# Altium PCB 1632440A+STM32F103RCT6核心板核心板.pcbdoc (part 2 of 2)
Units mil, origin at the board's own origin, x right, y up, seen from the top; angles counter-clockwise.
Board outline 4628.86 x 2908 mil, 2 copper layers (Top Layer, Bottom Layer); 59 components, 70 nets, 308 pads, 126 vias.
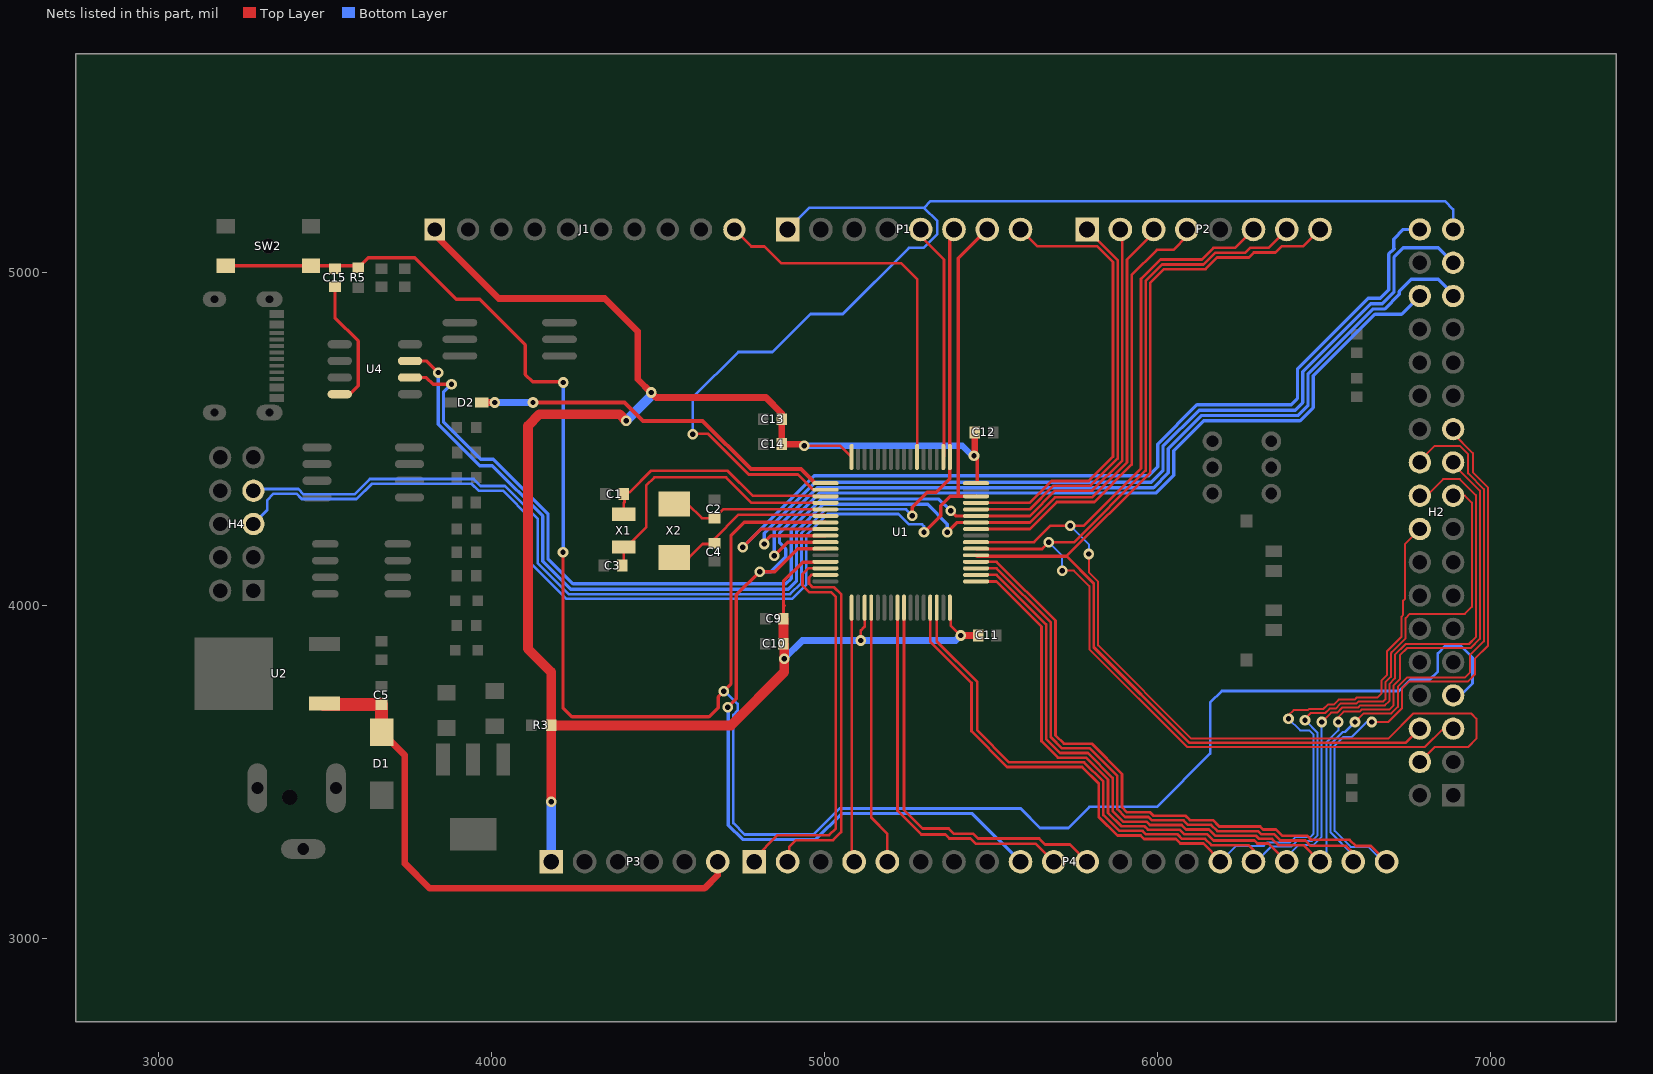
[diagram p2: the nets of this part, all layers, seen from the top]

## Via types
v1: diameter 32, hole 16, Top Layer to Bottom Layer, 126 vias

## Nets (pads, with @x,y where several pads share a name; then routed paths per layer and width w, separated by ;. In a path a pad name is that pad's centre, name@x,y a point inside that pad or via, vN(x,y) a via of type N, cw(c..) or ccw(c..) an arc to the next point about the centre after c; other vN are vias at no path point) (continued)
LCD_D10: H2.18 P4.15 U1.29 | length 2961.8
  Top Layer w6: v1(6393.86,3660) 6393.86,3670 6409.53,3685.67 6452.56,3685.67 6456.08,3689.19 6499.11,3689.19 6512.4,3702.49 6530.43,3702.49 6544.93,3716.99 6592.96,3716.99 6599.96,3723.99 6661.84,3723.99 6672.86,3735 6672.86,3773.85 6689.86,3790.85 6689.86,3862.57 6691.86,3864.23 6691.86,3864.97 6733.82,3906.93 6733.82,3966.93 6738.86,3971.97 6738.86,4015 6744.39,4020.54 6744.39,4185.54 H2.18@6788.86,4230
  Top Layer w8: U1.29@5317.44,3993.63 5317.44,3891.62 5441.46,3767.6 5441.46,3622.4 5548.86,3515 5773.86,3515 5823.86,3465 5823.86,3365 5880.06,3308.8 5949.66,3308.8 5960.11,3298.35 6055.51,3298.35 6068.86,3285 6138.01,3285 6188.86,3234.16 P4.15@6188.86,3230
  Bottom Layer w6: P4.15@6188.86,3230 6236.86,3278 6319.89,3278 6329.87,3287.99 6397.9,3287.99 6413.92,3304 6458.92,3304 6469.86,3314.94 6469.86,3612.03 6456.89,3625 6428.86,3625 v1(6393.86,3660)
LCD_D11: H2.19 P4.16 U1.30 | length 3209
  Top Layer w6: v1(6443.86,3655) 6443.86,3660 6461.05,3677.19 6504.08,3677.19 6517.37,3690.49 6535.4,3690.49 6549.9,3704.99 6597.93,3704.99 6604.93,3711.99 6678.87,3711.99 6684.86,3717.97 6684.86,3768.88 6701.86,3785.88 6701.86,3856.94 6703.86,3858.6 6703.86,3860 6745.82,3901.96 6745.82,3961.96 6758.86,3975 6923.86,3975 6944.86,3996 6944.86,4309 6923.86,4330 H2.19@6888.86,4330
  Top Layer w8: U1.30@5337.13,3993.63 5337.13,3891.73 5458.86,3770 5458.86,3624.8 5554.66,3529 5779.66,3529 5837.86,3470.8 5837.86,3370.8 5885.86,3322.8 5955.45,3322.8 5965.91,3312.35 6061.31,3312.35 6074.66,3299 6143.81,3299 6162.81,3280 6273.86,3280 6288.86,3265 P4.16@6288.86,3230
  Bottom Layer w6: P4.16@6288.86,3230 6296.86,3230 6342.84,3275.99 6402.87,3275.99 6418.89,3292 6463.89,3292 6481.86,3309.97 6481.86,3617 v1(6443.86,3655)
LCD_D12: H2.20 P4.17 U1.33 | length 3308.4
  Top Layer w6: v1(6493.86,3650) 6522.34,3678.49 6540.37,3678.49 6554.87,3692.99 6602.9,3692.99 6609.9,3699.99 6683.84,3699.99 6696.86,3713 6696.86,3763.91 6713.86,3780.91 6713.86,3851.97 6746.35,3884.46 6936.35,3884.46 6956.86,3904.97 6956.86,4332 6908.86,4380 6858.86,4380 6808.86,4330 H2.20@6788.86,4330
  Top Layer w8: U1.33@5455.23,4072.36 5516.5,4072.36 5651.86,3937 5651.86,3592.6 5701.46,3543 5785.45,3543 5851.86,3476.6 5851.86,3376.6 5891.66,3336.8 5961.25,3336.8 5971.71,3326.35 6067.11,3326.35 6080.45,3313 6149.61,3313 6168.61,3294 6291.39,3294 6300.39,3285 6333.86,3285 P4.17@6388.86,3230
  Bottom Layer w6: P4.17@6388.86,3230 6388.86,3245 6423.86,3280 6468.86,3280 6493.86,3305 v1(6493.86,3650)
LCD_D13: H2.21 P4.18 U1.34 | length 3271.1
  Top Layer w6: v1(6543.86,3650) 6543.86,3665 6559.84,3680.99 6607.87,3680.99 6614.87,3687.99 6697.9,3687.99 6708.86,3698.94 6708.86,3758.94 6728.86,3778.94 6728.86,3850 6751.32,3872.46 6941.32,3872.46 6968.86,3900 6968.86,4345 6888.86,4425 H2.21@6888.86,4430
  Top Layer w8: U1.34@5455.23,4092.05 5516.61,4092.05 5665.86,3942.8 5665.86,3598.4 5707.26,3557 5791.25,3557 5865.86,3482.4 5865.86,3382.4 5897.45,3350.8 5967.05,3350.8 5977.51,3340.35 6072.91,3340.35 6086.25,3327 6155.41,3327 6174.41,3308 6297.19,3308 6306.19,3299 6344.86,3299 6363.86,3280 6438.86,3280 P4.18@6488.86,3230
  Bottom Layer w6: P4.18@6488.86,3230 6488.86,3235 6508.86,3255 6508.86,3590 6543.86,3625 v1(6543.86,3650)
LCD_D14: H2.22 P4.19 U1.35 | length 3570.9
  Top Layer w6: v1(6593.86,3650) 6619.84,3675.99 6702.87,3675.99 6722.67,3695.78 6722.67,3755.78 6751.35,3784.46 6924.8,3784.46 6938.86,3798.52 6938.86,3850.07 6980.86,3892.07 6980.86,4349.97 6933.86,4396.97 6933.86,4455 6908.86,4480 6833.86,4480 6788.86,4435 H2.22@6788.86,4430
  Top Layer w8: U1.35@5455.23,4111.73 5516.73,4111.73 5679.86,3948.6 5679.86,3604.2 5713.06,3571 5797.05,3571 5879.86,3488.2 5879.86,3388.2 5903.25,3364.8 5972.85,3364.8 5983.31,3354.35 6078.71,3354.35 6092.05,3341 6161.21,3341 6180.21,3322 6302.99,3322 6311.99,3313 6350.66,3313 6369.66,3294 6444.66,3294 6460.66,3278 6566.86,3278 6588.86,3256 P4.19@6588.86,3230
  Bottom Layer w6: P4.19@6588.86,3230 6588.86,3250 6520.86,3318 6520.86,3583.97 6556.89,3620 6563.86,3620 v1(6593.86,3650)
LCD_D15: H2.23 P4.20 U1.36 | length 3659.8
  Top Layer w6: v1(6643.86,3650) 6693.86,3650 6735.13,3691.28 6735.13,3751.28 6756.32,3772.46 6933.53,3772.46 6953.86,3792.79 6953.86,3840 6993.86,3880 6993.86,4353.94 6947.93,4399.87 6947.93,4457.9 6888.86,4516.97 H2.23@6888.86,4530
  Top Layer w8: U1.36@5455.23,4131.42 5516.83,4131.42 5693.86,3954.4 5693.86,3610 5718.86,3585 5802.85,3585 5893.86,3493.99 5893.86,3393.99 5909.05,3378.8 5978.65,3378.8 5989.1,3368.35 6084.51,3368.35 6097.85,3355 6167.01,3355 6186.01,3336 6308.79,3336 6317.79,3327 6356.45,3327 6375.45,3308 6450.45,3308 6462.45,3296 6577.66,3296 6596.19,3277.46 6641.39,3277.46 P4.20@6688.86,3230
  Bottom Layer w6: v1(6643.86,3650) 6629.21,3650 6584.21,3605 6558.86,3605 6532.86,3579 6532.86,3322.97 6580.83,3275 6633.86,3275 6678.86,3230 P4.20@6688.86,3230
LCD_RD: H2.6 P2.8 U1.37 | length 3198.9
  Top Layer w8: P2.8@6488.86,5130 6438.86,5080 6373.86,5080 6354.86,5061 6289.86,5061 6274.86,5046 6179.45,5046 6144.45,5011 6019.86,5011 5978.86,4970 5978.86,4400 5727.18,4148.33 5808.86,4066.65 5808.86,3874.64 6095.5,3588 6746.86,3588 H2.6@6788.86,3630
  Top Layer w10: U1.37@5455.23,4151.1 5458,4148.33 5727.18,4148.33
LCD_RS: H2.4 P2.6 U1.39 | length 3500.3
  Top Layer w6: v1(5793.86,4155) 5793.86,4100.04 5821.86,4072.04 5821.86,3880.03 6100.89,3601 6694.86,3601 6769.39,3675.54 6943.32,3675.54 6958.86,3660 6958.86,3600 6933.86,3575 6833.85,3575 H2.4@6788.85,3530
  Top Layer w8: U1.39@5455.23,4190.47 5629.33,4190.47 5678.86,4240 v1(5737.91,4240) 5779.26,4240 5950.86,4411.6 5950.86,4981.6 6009.26,5040 6133.86,5040 6168.86,5075 6233.86,5075 P2.6@6288.86,5130
  Bottom Layer w6: v1(5737.91,4240) 5793.86,4184.05 v1(5793.86,4155)
LCD_WR: H2.5 P2.7 U1.38 | length 3294.9
  Top Layer w6: v1(5713.86,4105) 5748.86,4105 5795.86,4058 5795.86,3869.26 6090.12,3575 6803.86,3575 6858.86,3630 H2.5@6888.85,3630
  Top Layer w8: U1.38@5455.23,4170.79 5456.02,4170 5653.86,4170 v1(5673.86,4190) 5749.06,4190 5964.86,4405.8 5964.86,4975.8 6014.06,5025 6138.66,5025 6173.66,5060 6263.86,5060 6278.86,5075 6333.86,5075 P2.7@6388.86,5130
  Bottom Layer w6: v1(5673.86,4190) 5713.86,4150 v1(5713.86,4105)
NRST: C15.1 H2.7 R5.1 SW2.1 SW2.2 U1.7 | length 6760.8
  Top Layer w10: SW2.2@3200.86,5020.9 SW2.1@3456.76,5020.9 3592.62,5020.9 R5.1@3598.86,5014.66 3629.2,5045 3768.22,5045 3893.22,4920 3963.86,4920 4100.86,4783 4100.86,4694 4122.86,4672 4212.86,4672 v1(4214.86,4670) ; v1(4213.86,4160) 4213.86,3693 4241.06,3665.8 4600.06,3665.8 4600.26,3666 4652.86,3666 4680.07,3693.22 4680.07,3725.22 v1(4696.86,3742) 4718.86,3764 4718.86,4210 4758.86,4250 5002.02,4250 U1.7@5002.49,4249.53
  Bottom Layer w8: v1(4696.86,3742) 4700.86,3742 4738.86,3704 4738.86,3684 4725.86,3671 4725.86,3346.21 4760.07,3312 4966.86,3312 5044.86,3390 5589.56,3390 5648.06,3331.5 5732.64,3331.5 5796.14,3395 5998.37,3395 6158.86,3555.49 6158.86,3708 6193.86,3743 6725.86,3743 6760.86,3778 6818.47,3778 6842.86,3802.38 6842.86,3856 6864.86,3878 6912.86,3878 6946.86,3844 6946.86,3766 6910.86,3730 H2.7@6888.86,3730
  Bottom Layer w10: v1(4213.86,4160) 4214.86,4161 v1(4214.86,4670)
PA0: P4.1 U1.14 | length 1212.3
  Top Layer w8: P4.1@4788.86,3230 4788.86,3240 4858.86,3310 5013.86,3310 5033.86,3330 5033.86,4025 5018.86,4040 4953.86,4040 4933.86,4060 4933.86,4095 4950.59,4111.73 U1.14@5002.49,4111.73
PA1: P4.2 U1.15 | length 1116.9
  Top Layer w8: P4.2@4888.86,3230 4893.86,3235 4893.86,3275 4913.86,3295 5025.12,3295 5049.86,3319.73 5049.86,4034 5028.86,4055 4963.86,4055 4953.12,4065.74 4953.12,4084.26 4960.91,4092.05 U1.15@5002.49,4092.05
PA3: P4.4 U1.17 | length 769.1
  Top Layer w8: U1.17@5081.22,3993.63 5081.22,3233.64 5084.86,3230 P4.4@5088.86,3230
PA4: P4.5 U1.20 | length 783.8
  Top Layer w8: U1.20@5140.28,3993.63 5140.28,3362.58 5188.86,3314 P4.5@5188.86,3230
PA8: P2.4 U1.41 | length 1352.1
  Top Layer w8: U1.41@5455.23,4229.84 5616.93,4229.84 5698.09,4311 5810.66,4311 5922.86,4423.2 5922.86,4993.2 5998.66,5069 6047.86,5069 6088.86,5110 P2.4@6088.86,5130
PA9: P2.3 U1.42 U4.7 | length 3671.6
  Top Layer w8: U1.42@5455.23,4249.53 5616.82,4249.53 5692.29,4325 5803.86,4325 5908.86,4430 5908.86,5040 5988.86,5120 P2.3@5988.86,5130
  Top Layer w10: U4.7@3754.47,4735 3803.86,4735 v1(3838.86,4700) ; v1(5368.86,4220) 5398.39,4249.53 U1.42@5455.23,4249.53
  Bottom Layer w10: v1(3838.86,4700) 3838.86,4545 3963.86,4420 4002.04,4420 4152.86,4269.18 4152.86,4133.37 4237.23,4049 4890.48,4049 4915.86,4074.37 4915.86,4223.86 4995.99,4304 5309.86,4304 5368.86,4245 v1(5368.86,4220)
PA10: P2.2 U1.43 U4.6 | length 3557
  Top Layer w8: U1.43@5455.23,4269.21 5616.7,4269.21 5692.49,4345 5804.06,4345 5894.86,4435.8 5894.86,5124 P2.2@5888.86,5130
  Top Layer w10: U4.6@3754.47,4685 3803.86,4685 3823.86,4665 v1(3878.86,4665) ; v1(5378.86,4285) 5394.65,4269.21 U1.43@5455.23,4269.21
  Bottom Layer w10: v1(3878.86,4665) 3854.86,4641 3854.86,4551.63 3966.48,4440 4004.67,4440 4168.86,4275.81 4168.86,4140 4243.86,4065 4883.86,4065 4899.86,4081 4899.86,4230.49 4989.37,4320 5343.86,4320 v1(5378.86,4285)
PA11: P2.1 U1.44 | length 1215.4
  Top Layer w8: U1.44@5455.23,4288.9 5616.59,4288.9 5687.92,4360.23 5799.49,4360.23 5880.86,4441.6 5880.86,5038 P2.1@5788.86,5130
PA12: P1.8 U1.45 | length 1372.4
  Top Layer w8: U1.45@5455.23,4308.58 5616.47,4308.58 5682.12,4374.23 5793.69,4374.23 5866.86,4447.4 5866.86,5032.2 5819.06,5080 5638.86,5080 P1.8@5588.86,5130
PA13: H4.5 P1.7 U1.46 | length 3600.1
  Top Layer w10: v1(5298.86,4220) 5348.86,4270 5348.86,4300 5377.13,4328.27 5402.13,4328.27 ; U1.46@5455.23,4328.27 5402.13,4328.27 ; P1.7@5488.86,5130 5402.13,5043.27 5402.13,4328.27
  Bottom Layer w8: H4.5@3283.86,4245 3325.19,4286.34 3325.19,4316.34 3344.86,4336 3413.06,4336 3429.06,4320 3593.66,4320 3639.66,4366 3939.58,4366 3960.58,4345 4034.06,4345 4119.86,4259.2 4119.86,4125.36 4225.22,4020 4902.5,4020 4944.86,4062.36 4944.86,4211 5008.86,4275 5222.09,4275 5253.09,4244 5292.86,4244 5298.86,4238 v1(5298.86,4220)
PA14: H4.7 P1.6 U1.49 | length 3358.2
  Top Layer w8: U1.49@5376.5,4427.26 U1.49@5376.5,4446.37
  Top Layer w10: v1(5263.86,4270) 5263.86,4295 5308.86,4340 5335.9,4340 5376.5,4380.6 U1.49@5376.5,4427.26 ; U1.49@5376.5,4446.37 5376.5,5117.64 P1.6@5388.86,5130
  Bottom Layer w8: H4.7@3283.86,4345 3288.86,4350 3418.86,4350 3434.86,4334 3587.86,4334 3633.86,4380 3945.38,4380 3966.38,4359 4039.86,4359 4137.86,4261 4137.86,4127.16 4231.02,4034 4896.7,4034 4930.86,4068.16 4930.86,4217.65 5002.21,4289 5244.86,4289 v1(5263.86,4270)
PA15: P1.5 U1.50 | length 713.5
  Top Layer w8: P1.5@5288.86,5130 5288.86,5110 5358.86,5040 5358.86,4448.42 U1.50@5356.81,4446.37
PC0: H2.36 U1.8 | length 2875.7
  Top Layer w10: v1(4753.86,4175) 4808.7,4229.84 U1.8@5002.49,4229.84
  Bottom Layer w10: v1(4753.86,4175) 4968.86,4390 5973.86,4390 6000.86,4417 6000.86,4484.88 6118.97,4603 6401.86,4603 6420.86,4622 6420.86,4709.88 6633.97,4923 6669.42,4923 6695.23,4948.81 6695.23,5056.37 6709.94,5071.08 ; 6711.36,5072.5 6709.94,5071.08 ; H2.36@6788.85,5130 6738.86,5130 6709.94,5101.08 6709.94,5071.08
PC1: H2.33 U1.9 | length 2827.4
  Top Layer w10: v1@4818.86,4190 4838.86,4210 5002.33,4210 U1.9@5002.49,4210.16
  Bottom Layer w10: v1(4818.86,4185) 4818.86,4217.37 4971.48,4370 5981.86,4370 6016.86,4405 6016.86,4478.25 6125.6,4587 6413.86,4587 6436.86,4610 6436.86,4703.25 6640.6,4907 6676.05,4907 6711.23,4942.18 6711.23,5047.37 6738.86,5075 6843.85,5075 H2.33@6888.85,5030
PC2: H2.31 U1.10 | length 2725
  Top Layer w10: v1(4848.86,4150) 4888.86,4190 5002.02,4190 U1.10@5002.49,4190.47
  Bottom Layer w10: v1(4848.86,4150) 4848.86,4224.75 4978.11,4354 5988.48,4354 6032.86,4398.37 6032.86,4471.63 6132.23,4571 6422.23,4571 6452.86,4601.63 6452.86,4696.63 6647.23,4891 6682.67,4891 6727.23,4935.55 6727.23,4943.85 6763.38,4980 6843.86,4980 6888.85,4935.01 H2.31@6888.85,4930
PC3: H2.32 P4.9 U1.11 | length 4511.1
  Top Layer w10: v1(4708.86,3694) 4734.86,3720 4734.86,4032 v1(4804.86,4102) 4850.86,4102 4919.65,4170.79 U1.11@5002.49,4170.79
  Bottom Layer w10: v1(4708.86,3694) 4710.86,3692 4710.86,3340 4753.86,3297 4973.07,3297 5051.07,3375 5443.86,3375 P4.9@5588.86,3230 ; v1(4804.86,4102) 4839.04,4102 4883.86,4146.82 4883.86,4170 4864.86,4189 4864.86,4218.12 4984.74,4338 5995.11,4338 6048.86,4391.75 6048.86,4465 6138.86,4555 6428.86,4555 6468.86,4595 6468.86,4690 6653.86,4875 6733.86,4875 H2.32@6788.86,4930
PC4: P4.10 U1.24 | length 1144.1
  Top Layer w8: U1.24@5219.02,3993.63 5219.02,3383.84 5290.86,3312 5362.86,3312 5374.86,3300 5436.86,3300 5437.73,3299.12 5438.66,3300 5454.66,3284 5634.86,3284 P4.10@5688.86,3230
PC5: P4.11 U1.25 | length 1222.3
  Top Layer w8: U1.25@5238.7,3993.63 5238.7,3386.16 5294.86,3330 5372.74,3330 5388.74,3314 5446.86,3314 5460.86,3300 5644.86,3300 5662.86,3282 5736.86,3282 P4.11@5788.86,3230
PC13: H2.35 P1.1 U1.2 | length 3718.5
  Top Layer w8: v1(4603.86,4515) 4605.04,4516.19 4650.04,4516.19 4772.23,4394 4919.86,4394 4965.91,4347.95 U1.2@5002.49,4347.95
  Bottom Layer w8: v1(4603.86,4515) 4603.86,4625 4740.86,4762 4843.66,4762 4957.66,4876 5054.66,4876 5253.47,5074.81 5297.94,5074.81 5338.86,5115.72 5338.86,5155 5298.86,5195 ; P1.1@4888.86,5130 4953.86,5195 5298.86,5195 ; H2.35@6888.85,5130 6888.86,5190 6863.86,5215 5318.86,5215 5298.86,5195
PC14: C1.2 U1.3 X1.1 | length 726.6
  Top Layer w8: X1.1@4396.42,4274.41 4396.42,4308.11 4398.86,4310.55 C1.2@4398.86,4335 ; C1.2@4396.42,4335 C1.2@4398.86,4335 ; C1.2@4398.86,4335.21 C1.2@4398.86,4335 ; C1.2@4398.86,4340 4413.86,4340 4478.86,4405 4708.86,4405 4783.86,4330 5000.76,4330 U1.3@5002.49,4328.27
PC15: C3.2 U1.4 X1.2 | length 853.3
  Top Layer w8: C3.2@4396.42,4120.21 X1.2@4396.42,4176.01 4404.87,4176.01 4463.86,4235 4463.86,4360 4488.86,4385 4703.86,4385 4780.28,4308.58 U1.4@5002.49,4308.58
PD0: C2.2 U1.5 X2.2 | length 482.5
  Top Layer w8: X2.2@4548.86,4305.7 4588.16,4305.7 4631.42,4262.44 C2.2@4668.86,4262.44 4695.32,4288.9 U1.5@5002.49,4288.9
PD1: C4.2 U1.6 X2.1 | length 515.8
  Top Layer w8: X2.1@4548.86,4144.3 4593.16,4144.3 4633.86,4185 4666.3,4185 C4.2@4668.86,4187.56 4668.86,4200 4741.85,4272.99 4998.7,4272.99 U1.6@5002.49,4269.21
PD2: J1.10 U1.54 | length 1145.4
  Top Layer w8: J1.10@4728.86,5130 4779.86,5079 4819.66,5079 4869.66,5029 5229.86,5029 5278.07,4980.79 U1.54@5278.07,4446.37
RTS#: C15.2 U4.4 | length 392.4
  Top Layer w10: C15.2@3528.86,4957.44 3528.86,4865 3598.86,4795 3598.86,4660 3573.86,4635 U4.4@3543.25,4635
VBAT: D2.1 U1.1 | length 1132.9
  Top Layer w12: v1(4123.86,4610) 4398.86,4610 4453.86,4555 4633.86,4555 4778.86,4410 4928.86,4410 4971.22,4367.64 U1.1@5002.49,4367.64
  Top Layer w20: D2.1@3970.02,4610 v1(4008.86,4610)
  Bottom Layer w20: v1(4008.86,4610) v1(4123.86,4610)
VCC: C9.1 C10.1 C11.1 C12.1 C13.1 C14.1 J1.1 P3.1 R3.2 U1.13 U1.19 U1.32 U1.48 U1.64 | length 6149.6
  Top Layer w8: v1(4938.86,4480) 5047.59,4480 U1.64@5081.22,4446.37 ; v1(5108.86,3895) 5108.86,3925 5118.86,3935 5118.86,3935.53 5120.59,3937.26 U1.19@5120.59,3993.63 ; U1.32@5376.5,3993.63 5378.86,3991.27 5378.86,3940 v1(5408.86,3910)
  Top Layer w10: C9.1@4876.42,3960 4876.42,3997.56 ; 4878.86,4000 4876.42,3997.56 ; U1.13@5002.49,4131.42 5001.07,4130 4933.86,4130 4876.42,4072.56 4876.42,3997.56 ; v1(5448.86,4450) 5458.86,4440 5458.86,4371.27 U1.48@5455.23,4367.64
  Top Layer w20: J1.1@3828.86,5130 3828.86,5115 4021.09,4922.77 4339.33,4922.77 4438.86,4823.24 4438.86,4680 v1(4478.85,4640.01) 4493.86,4625 4823.86,4625 4871.42,4577.44 C13.1@4871.42,4560 C14.1@4871.42,4485 4938.86,4485 v1(4938.86,4480) ; v1(5408.86,3910) C11.1@5461.3,3910 ; v1(5448.86,4450) 5451.3,4452.44 C12.1@5451.3,4520
  Top Layer w29.53: v1(4178.86,3410) 4178.52,3410.34 R3.2@4178.52,3640 ; v1(4403.86,4555) 4383.86,4575 4143.86,4575 4108.86,4540 4108.86,3870 4178.52,3800.34 R3.2@4178.52,3640 ; C9.1@4876.42,3960 C10.1@4876.42,3885 4878.86,3882.56 v1(4878.86,3840.48) 4878.86,3800 4718.86,3640 R3.2@4178.52,3640
  Bottom Layer w20: v1(4878.86,3840.48) 4933.38,3895 v1(5108.86,3895) 5393.86,3895 v1(5408.86,3910) ; v1(4938.86,4480) 5413.86,4480 5443.86,4450 v1(5448.86,4450)
  Bottom Layer w29.53: v1(4178.86,3410) 4178.86,3240 P3.1@4188.86,3230 ; v1(4403.86,4555) 4478.85,4629.99 v1(4478.85,4640.01)
VIN: C5.1 D1.1 P3.6 U2.1 | length 1712.5
  Top Layer w20: D1.1@3668.86,3619.5 3738.86,3549.5 3738.86,3225 3813.86,3150 4638.86,3150 4678.86,3190 P3.6@4678.86,3230
  Top Layer w39.37: U2.1@3491.46,3705 3494.02,3702.44 C5.1@3668.86,3702.44 D1.1@3668.86,3619.5
pads on no net: H2.34 H4.2 H4.3 H4.4 H4.6 H4.8 H4.10 SW1.1 SW1.2 SW1.3 SW6.2 SW6.5 SW6.6 USB1.3 USB1.4 USB1.9 USB1.10

## Polygon pours and split planes (outlines as drawn)
GND on Bottom Layer (solid, remove dead copper, pour order 2): 3013.86,5275 7128.86,5275 7128.86,3000 3013.86,3000
GND on Top Layer (solid, remove dead copper, pour order 2): 3018.86,5265 7113.86,5265 7113.86,3040 3018.86,3040

## Keep-outs
Top Layer:
  region: 4468.86,4365 4628.86,4365 4628.86,4085 4468.86,4085
  region: 4352.2,4300.01 4438.85,4300.01 4438.85,4152.88 4352.2,4152.88
Board Outline Layer:
  circle w1: c6638.86,5130 r62.5
  circle w10: c6638.86,5130 r62.5
  circle w1: c5688.86,3430 r62.5
  circle w10: c5688.86,3430 r62.5
  circle w1: c5688.86,4530 r62.5
  circle w10: c5688.86,4530 r62.5
  circle w1: c3688.86,5130 r62.5
  circle w10: c3688.86,5130 r62.5
  circle w1: c3638.86,3230 r62.5
  circle w10: c3638.86,3230 r62.5
  region: 6825.86,3230 6951.84,3230
  lines w1: 6825.86,3230 ccw(c6888.85,3230) 6951.84,3230 ccw(c6888.85,3230) 6825.86,3230
  lines w3.94: 3094.86,3169.37 ccw(c3134.23,3169.37) 3134.23,3130 6955.48,3130 ccw(c6955.48,3169.37) 6994.85,3169.37 6994.85,3230 7094.85,3330 7094.85,4620 6994.85,4720 6994.85,5170 6934.85,5230 3134.23,5230 ccw(c3134.23,5190.63) 3094.86,5190.63 3094.86,3169.37

## Other copper
Top Layer:
  drawing of 314 lines, arcs and shapes, not listed
Bottom Layer:
  region net BOOT0: 6145.75,4437.15 6115.08,4420 6115.08,4410 6145.75,4392.85
  region net PC13: 4932.79,5168.28 4927.14,5173.94 4904.51,5165.45 4924.31,5145.65
  region net EEPROM_SCL: 4964.11,5104.62 4987.52,5069.46 4995.52,5070.07 5017.13,5108.62
  region net EEPROM_SDA: 5053.48,5132.22 5043.41,5090.21 5049.07,5084.56 5091.08,5094.62
  region net 3V3: 6952.33,3420 6952.33,3440 6922.33,3463.47 6922.33,3396.55
  region net NRST: 6917.45,3712.62 6940.86,3754.35 6938.17,3762.97 6902.53,3760.54
  region net LCD_D0: 6766.72,3755.1 6731.97,3733 6731.97,3727 6766.72,3704.9
  region net BOOT1: 6776.64,3861.16 6740.27,3862.83 6738,3856.61 6759.47,3813.99
  region net LCD_D4: 6813.36,3907.21 6843.96,3950.86 6843.19,3958.58 6808.41,3957.16
  region net LCD_D6: 6821.06,4020.89 6835.6,4062.5 6832.27,4067.66 6793.87,4063.09
  region net LCD_D8: 6818.24,4113.99 6839.71,4156.61 6837.45,4162.83 6801.07,4161.16
  region net LCD_D9: 6856.66,4239.11 6842.12,4197.5 6845.44,4192.34 6883.85,4196.91
  region net 3V3: 6890.3,4696.57 6925.23,4684.49 6937.86,4700.13 6921.85,4735.61
  region net +5V: 6763.22,4851.51 6730.57,4835 6733.59,4815 6770.72,4801.88
  region net PC2: 6894.47,4962.99 6855.08,4975.85 6847.26,4969.53 6855.42,4931.44
  region net PC3: 6755.46,4932.1 6745.09,4893.31 6752.17,4886.24 6790.95,4896.6
  region net PC1: 6890.95,5063.4 6852.16,5073.76 6845.09,5066.69 6855.46,5027.9
  region net PC13: 6913.95,5152.14 6892.86,5186.89 6884.86,5186.89 6863.76,5152.13
  region net PC0: 6766.72,5155.1 6738.86,5135 6738.86,5125 6766.72,5104.9
  region net PA14: 3309.49,4323.49 3341.24,4346 3340.03,4354 3301.99,4373.12
  region net PA13: 3317.26,4242.9 3326.91,4282.4 3321.26,4288.06 3281.76,4278.4
  region net 3V3: 3346.85,4045.16 3346.85,4064.84 3317.32,4076 3317.32,4020.55
  region net PC3: 5591.08,3265.36 5549.8,3276.13 5542.73,3269.06 5553.49,3227.78
  region net LCD_D0: 5915.73,3253.09 5917.99,3289.86 5909.62,3289.97 5862.59,3253.78
  region net LCD_D0: 5915.73,3253.09 5917.99,3289.86 5909.62,3289.97 5862.59,3253.78
  region net LCD_D1: 6012.62,3256.29 5987.86,3290.51 5981.86,3289.83 5959.81,3250.29
  region net LCD_D10: 6224.22,3227.78 6233.57,3270.47 6229.33,3274.71 6186.64,3265.36
  region net LCD_D13: 6524.02,3234.35 6511.86,3287.24 6505.86,3291.35 6480.15,3264.35
  region net LCD_D15: 6683.97,3265.09 6643.1,3270 6639.72,3264.9 6654.65,3220.77
  region net 3V3: 4252.28,3206.56 4268.86,3185 4288.86,3185 4305.43,3206.56
  region net VCC: 4193.62,3309.72 4164.09,3309.72 4143.42,3265.43 4214.29,3265.43
  region net VCC: 5098.27,3907 5081.66,3905 5081.66,3885 5098.27,3883
  region net VCC: 5119.44,3883 5136.06,3885 5136.06,3905 5119.44,3907
  region net VCC: 4949.44,4468 4966.06,4470 4966.06,4490 4949.44,4492
  region net VCC: 5446.31,4465.8 5432.67,4475.33 5421.73,4457.98 5433.5,4445.49
  region net BOOT1: 5327.44,3826 5344.06,3834 5344.06,3842 5327.44,3850
  region net BOOT1: 6273.27,4007 6256.66,3999 6256.66,3991 6273.27,3983
  region net VCC: 5392.89,3911 5386.79,3902.07 5400.93,3887.93 5409.86,3894.03
  region net VCC: 4894.83,3839.48 4905.16,3852.64 4891.02,3866.79 4877.85,3856.45
  region net PA13: 5310.86,4230.58 5302.86,4238 5294.86,4238 5286.86,4230.58
  region net PA14: 5264.86,4285.97 5247.69,4291.83 5242.03,4286.17 5247.89,4269
  region net BOOT0: 5269.44,4163 5286.06,4170 5286.06,4180 5269.44,4187
  region net PC13: 4615.86,4525.58 4607.86,4542.2 4599.86,4542.2 4591.86,4525.58
  region net JP_EEPROM_SCL: 3800.86,4130.58 3792.86,4147.2 3784.86,4147.2 3776.86,4130.58
  region net JP_EEPROM_SCL: 3988.27,4242 3971.66,4234 3971.66,4226 3988.27,4218
  region net JP_EEPROM_SDA: 3804.83,4064 3810.92,4081.4 3805.26,4087.06 3787.86,4080.97
  region net JP_EEPROM_SDA: 4003.36,4175.35 3985.67,4183.84 3978.73,4179.47 3983.06,4162.55
  region net JP_FLASH_CS: 3577.86,4474.03 3595.26,4467.94 3600.92,4473.6 3594.83,4491
  region net JP_FLASH_CS: 3996.86,4400.87 3974.8,4398 3969.36,4390 3983.36,4381.03
  region net EEPROM_SDA: 4334.83,4749 4340.92,4766.4 4335.26,4772.06 4317.85,4765.97
  region net EEPROM_SCL: 4294.62,4784.02 4317.49,4786 4323.9,4794 4309.62,4802.75
  region net JP_FLASH_CS: 3786.86,4839.42 3794.86,4822.8 3802.86,4822.8 3810.86,4839.42
  region net VBAT: 4019.44,4598 4036.06,4600 4036.06,4620 4019.44,4622
  region net VBAT: 4113.27,4622 4096.66,4620 4096.66,4600 4113.27,4598
  region net LCD_D0: 4019.44,4003 4036.06,4011 4036.06,4019 4019.44,4027
  region net LCD_D0: 5277.57,4076.34 5261.98,4058.78 5262.63,4048.12 5279.02,4052.38
  region net PC3: 4815.44,4090 4832.06,4097 4832.06,4107 4815.44,4114
  region net PC2: 4860.86,4160.58 4853.86,4177.2 4843.86,4177.2 4836.86,4160.58
  region net PC1: 4830.86,4195.58 4823.86,4212.2 4813.86,4212.2 4806.86,4195.58
  region net PC0: 4769.83,4174 4776.63,4190.7 4769.55,4197.77 4752.85,4190.97
  region net LCD_CS: 5829.86,4210.97 5811.74,4216.35 5807.5,4212.11 5812.89,4194
  region net LCD_CS: 5719.44,4273 5736.06,4282 5736.06,4288 5719.44,4297
  region net LCD_RS: 5805.86,4165.58 5796.86,4182.2 5790.86,4182.2 5781.86,4165.58
  region net LCD_RS: 5736.91,4224.03 5755.02,4218.65 5759.26,4222.89 5753.88,4241
  region net LCD_WR: 5725.86,4115.58 5716.86,4132.2 5710.86,4132.2 5701.86,4115.58
  region net LCD_WR: 5672.85,4174.03 5690.97,4168.65 5695.21,4172.89 5689.83,4191
  region net +5V: 4779.86,3324.77 4796.76,3326 4799.28,3346 4782.86,3348.58
  region net NRST: 4202.86,4659.42 4209.86,4642.8 4219.86,4642.8 4226.86,4659.42
  region net NRST: 4226.49,4169.81 4219.86,4186.88 4209.86,4187.5 4202.54,4171.31
  region net LCD_D9: 5074.44,4653 5091.06,4662 5091.06,4668 5074.44,4677
  region net LCD_D7: 5129.44,4728 5143.86,4737 5143.86,4743 5129.44,4752
  region net LCD_D6: 5159.44,4773 5176.06,4782 5176.06,4788 5159.44,4797
  region net LCD_D5: 5189.44,4813 5203.86,4822 5203.86,4828 5189.44,4837
  region net LCD_D4: 5219.78,4856.49 5233.41,4875.31 5232.17,4882.56 5215.73,4880.15
  region net LCD_D3: 5253.79,4925.04 5259.17,4943.15 5254.93,4947.39 5236.81,4942.01
  region net LCD_D3: 6547.85,4639.03 6565.97,4633.65 6570.21,4637.89 6564.83,4656
  region net LCD_D3: 6188.27,4997 6171.66,4988 6171.66,4982 6188.27,4973
  region net LCD_D4: 6547.85,4569.03 6559.27,4570.34 6563.51,4574.59 6564.83,4586
  region net LCD_D4: 6218.27,4957 6201.66,4948 6201.66,4942 6218.27,4933
  region net LCD_D6: 6560.67,4465.52 6580.01,4472.54 6581.76,4478.54 6567.37,4488.57
  region net LCD_D6: 6278.27,4887 6261.66,4878 6261.66,4872 6278.27,4863
  region net LCD_D7: 6577.85,4424.03 6595.97,4418.65 6600.21,4422.89 6594.83,4441
  region net LCD_D7: 6308.27,4852 6291.66,4843 6291.66,4837 6308.27,4828
  region net LCD_D8: 6577.85,4379.03 6595.97,4373.65 6600.21,4377.89 6594.83,4396
  region net LCD_D8: 6335.05,4813.09 6320.88,4803 6322.85,4797 6342.55,4790.29
  region net LCD_D9: 6588.69,4327.38 6605.16,4324.45 6605.65,4332.45 6590.15,4351.34
  region net LCD_D9: 6373.27,4782 6356.66,4773 6356.66,4767 6373.27,4758
  region net LCD_D15: 6632.33,3661.1 6617.2,3642.23 6617.84,3634.39 6634.29,3637.18
  region net LCD_D14: 6577.89,3651 6572.5,3632.89 6576.74,3628.65 6594.86,3634.03
  region net LCD_D13: 6531.86,3639.42 6540.86,3625 6546.86,3625 6555.86,3639.42
  region net LCD_D12: 6481.86,3639.42 6490.86,3622.8 6496.86,3622.8 6505.86,3639.42
  region net LCD_D11: 6442.85,3639.03 6460.97,3633.65 6465.21,3637.89 6459.83,3656
  region net LCD_D10: 6392.85,3644.03 6410.97,3638.65 6415.21,3642.89 6409.83,3661
  region net BOOT1: 6674.44,3968 6691.06,3977 6691.06,3983 6674.44,3992
  region net PA10: 3862.89,4666 3856.09,4649.3 3863.16,4642.23 3879.86,4649.03
  region net PA10: 5379.86,4300.97 5363.16,4307.77 5356.09,4300.7 5362.89,4284
  region net PA9: 5380.86,4230.58 5373.86,4245 5363.86,4245 5356.86,4230.58
  region net FLASH_MOSI: 5216.95,4093.8 5207.86,4106.77 5199.86,4105.67 5194.15,4086.3
  region net FLASH_MISO: 3614.44,4233 3628.86,4241 3628.86,4249 3614.44,4257
  region net FLASH_SCLK: 3614.83,4194 3620.92,4211.4 3615.26,4217.06 3597.86,4210.97
  region net FLASH_MISO: 5162.55,4119.71 5143.18,4114 5140.55,4106 5155.05,4096.91
  region net FLASH_SCLK: 5134.86,4090.97 5124.08,4090.43 5118.43,4084.77 5117.89,4074
  region net LCD_D5: 6547.85,4519.03 6565.97,4513.65 6570.21,4517.89 6564.83,4536
  region net 3V3: 3598.27,4067 3581.66,4064.84 3581.66,4045.16 3598.27,4043
  region net NRST: 4698.69,3726.11 4715.72,3721.48 4720.36,3728.15 4712.4,3745.81
  region net 3V3: 4710.89,3169 4701.79,3157.07 4715.93,3142.93 4727.86,3152.03

## Silkscreen, mask and mechanical layers (free items; w line width, h text height)
Top Silkscreen Layer:
  region: 4418.86,3297 4637.56,3297 4637.56,3127 4418.86,3127
  region: 3896.86,5230 3962.75,5230 3962.75,5080 3896.86,5080
  region: 6611.88,3392.91 6611.88,4355 6625.82,4355 6625.82,3392.91
  region: 4698.86,3406.03 4131.3,3406.03 4131.3,3419.97 4698.86,3419.97
  region: 5505.71,3384.03 4761.62,3384.03 4761.62,3397.97 5505.71,3397.97
  region: 4645.86,4963.03 4007.55,4963.03 4007.55,4976.97 4645.86,4976.97
  region: 5211.86,4962.03 4866.6,4962.03 4866.6,4975.97 5211.86,4975.97
  region: 6107.86,4960.03 5271.34,4960.03 5271.34,4973.97 6107.86,4973.97
  region: 6708.97,3383.03 6159.88,3383.03 6159.88,3396.97 6708.97,3396.97
  region: 6506.33,4960.03 6167.07,4960.03 6167.07,4973.97 6506.33,4973.97
  region: 5805.26,3383.61 5564.01,3383.61 5564.01,3397.54 5805.26,3397.54
  region: 6105.63,3383.03 5864.38,3383.03 5864.38,3396.97 6105.63,3396.97
  region: 4770.81,4963.03 4695.55,4963.03 4695.55,4976.97 4770.81,4976.97
  text "STM32F103RCT6开发板" at 3332.86,5288 h120
  text "客户编号:1632440A   在底层丝印上" at 5068.86,5280 h120
  text "EEPROM IIC" at 4923.86,5183 h39.37
  text "[C0]" at 6733.86,5135 h39.37 r90
  text "RESET" at 3093.86,5055 h40
  text "B9" at 4053.86,5006 h59.06 r90
  text "B7" at 4253.86,5006 h59.06 r90
  text "B6" at 4353.86,5006 h59.06 r90
  text "B5" at 4453.86,5006 h59.06 r90
  text "C9" at 6212.86,5006 h59.06 r90
  text "C8" at 6313.86,5006 h59.06 r90
  text "C7" at 6408.86,5006 h59.06 r90
  text "C6" at 6513.86,5006 h59.06 r90
  text "B8" at 4146.86,5004 h59.06 r90
  text "B4" at 4553.86,5004 h59.06 r90
  text "B3" at 4653.86,5004 h59.06 r90
  text "D2" at 4757.86,5004 h59.06 r90
  text "A9" at 6024.86,5004 h59.06 r90
  text "A8" at 6112.86,5004 h59.06 r90
  text "A11" at 5813.86,5000 h50 r90
  text "MO" at 6663.86,5000 h50
  text "C11" at 5119.86,4994 h59.06 r90
  text "A10" at 5913.86,4990 h50 r90
  text "[C1]" at 6983.86,4990 h39.37 r90
  text "C13" at 4918.86,4982 h59.06 r90
  text "C12" at 5019.86,4980 h59.06 r90
  text "C10" at 5218.86,4980 h59.06 r90
  text "A15" at 5322.86,4978 h59.06 r90
  text "A14" at 5419.86,4978 h59.06 r90
  text "A13" at 5517.86,4978 h59.06 r90
  text "A12" at 5622.86,4978 h59.06 r90
  text "GND" at 3962.74,4922.53 h59.06 r90
  text "VCC" at 3852.86,4922 h59.06 r90
  text "GPIO B3-B9" at 4005.33,4904.73 h60
  text "MOSI" at 6618.86,4905 h50
  text "GPIO A8-A15" at 5272.31,4902.96 h60
  text "[C2]" at 6983.86,4883 h39.37 r90
  text "TX→" at 6016.86,4866 h39.37 r90
  text "RX←" at 5906.86,4864 h39.37 r90
  text "TFT LCD" at 6617.86,4850 h60 r90
  text "SPIFLASH_CS" at 4258.86,4830 h39.37
  text "5V" at 6664.83,4801.62 h50
  text "EEPROM_SCL" at 4258.86,4780 h39.37
  text "STM32F103RCT6 Dev. Board" at 5298.86,4762 h78.74
  text "EEPROM_SDA" at 4256.55,4730 h39.37
  text "Designed By HNB" at 6074.86,4714 h59.06
  text "GND" at 6638.86,4705 h50
  text "→Turn Right ON" at 4228.86,4680 h39.37
  text "3V3" at 6638.86,4605 h50
  text "BL" at 6948.86,4590 h50
  text "VBAT" at 3983.86,4510 h39.37
  text "GND" at 6638.86,4500 h50
  text "D15" at 6948.86,4490 h50
  text "BOOT0" at 5908.86,4485 h39.37
  text "GND" at 3338.86,4422 h39.37
  text "Up: Normal" at 5908.86,4420 h39.37
  text "D14" at 6643.86,4405 h50
  text "D13" at 6948.86,4395 h50
  text "Down:BOOT1" at 5908.86,4360 h39.37
  text "CLK" at 3330.86,4318 h39.37
  text "D12" at 6648.86,4300 h50
  text "D11" at 6948.86,4295.17 h50
  text "DIO" at 3334.86,4222 h39.37
  text "D10" at 6648.86,4205 h50
  text "D9" at 6948.86,4199.16 h50
  text "BOOT1" at 5893.86,4195 h39.37
  text "System Memory" at 5898.86,4120 h39.37
  text "D8" at 6663.86,4105 h50
  text "D7" at 6948.86,4098.47 h50
  text "GPIO PB2" at 5898.86,4020 h39.37
  text "3V3" at 3336.86,4018 h39.37
  text "D6" at 6669.83,4006.62 h50
  text "D5" at 6948.86,3995 h50
  text "Blink" at 4008.86,3985 h59.06
  text "Embedded SRAM" at 5893.86,3920 h39.37
  text "D4" at 6664.83,3901.62 h50
  text "D3" at 6948.86,3900 h50
  text "PWR" at 4003.86,3835 h59.06
  text "D2" at 6668.86,3805 h50
  text "D1" at 6948.86,3795 h50
  text "D0" at 6666.86,3699.99 h50
  text "RST" at 6948.86,3695 h50
  text "RD" at 6668.86,3605 h50
  text "WR" at 6948.86,3590 h50
  text "VCC" at 4098.86,3565 h39.37
  text "Max: 35V" at 3276.16,3520.43 h51.61
  text "0.96' OLED" at 6613.86,3510 h60 r90
  text "RS" at 6668.86,3510 h50
  text "CS" at 6948.86,3500 h50
  text "POWER" at 4130.86,3408 h70
  text "3V3" at 6948.86,3405 h50
  text "GND" at 6638.86,3400 h50
  text "B10-B15" at 6163.86,3395 h60
  text "GPIO A0-A7" at 4760.86,3392 h60
  text "GND" at 4418.86,3292 h78.74
  text "5V" at 4408.86,3289.8 h59.06 r90
  text "B13" at 6513.86,3290 h59.06 r90
  text "B14" at 6613.86,3290 h59.06 r90
  text "B10" at 6211.01,3288.8 h59.06 r90
  text "B11" at 6312.38,3288.8 h59.06 r90
  text "B2" at 6114.64,3287.65 h59.06 r90
  text "B12" at 6413.86,3287.8 h59.06 r90
  text "B15" at 6718.86,3287.8 h59.06 r90
  text "3V3" at 4303.86,3287 h59.06 r90
  text "A1" at 4918.86,3287 h59.06 r90
  text "A2" at 5018.86,3287 h59.06 r90
  text "A3" at 5118.86,3287 h59.06 r90
  text "A4" at 5213.86,3287 h59.06 r90
  text "A5" at 5313.86,3287 h59.06 r90
  text "A6" at 5408.86,3287 h59.06 r90
  text "A7" at 5513.86,3287 h59.06 r90
  text "C3" at 5616.05,3287 h59.06 r90
  text "C4" at 5713.86,3287 h59.06 r90
  text "C5" at 5813.86,3287 h59.06 r90
  text "B0" at 5913.86,3287 h59.06 r90
  text "B1" at 6013.86,3287 h59.06 r90
  text "VIN" at 4702.72,3284.8 h59.06 r90
  text "A0" at 4813.86,3285 h59.06 r90
  text "VCC" at 4203.86,3255 h59.06 r90
  text "7V~35V" at 3116.86,3150 h78.74
  text "FLASH" at 4928.86,3132 h39.37
Bottom Silkscreen Layer:
  text "BILIBILI幻星集VI" at 3160.86,3932 h59.06 r270
  text "1632440A" at 4098.86,3152 h70.87
Mechanical Layer:
  circle w1: c6638.86,5130 r62.5
  circle w1: c5688.86,3430 r62.5
  circle w1: c5688.86,4530 r62.5
  circle w1: c3688.86,5130 r62.5
  circle w1: c3638.86,3230 r62.5
  lines w1: 6825.86,3230 ccw(c6888.85,3230) 6951.84,3230 ccw(c6888.85,3230) 6825.86,3230